# Altium PCB Brain_Stim_Final_Layout.PcbDoc (part 1 of 3)
Units mil, origin at the board's own origin, x right, y up, seen from the top; angles counter-clockwise.
Board outline 3530 x 5285 mil, 4 copper layers (Top Layer, Layer 1, Layer 2, Bottom Layer), stack 62.449 mil thick; 148 components, 116 nets, 618 pads, 378 vias.
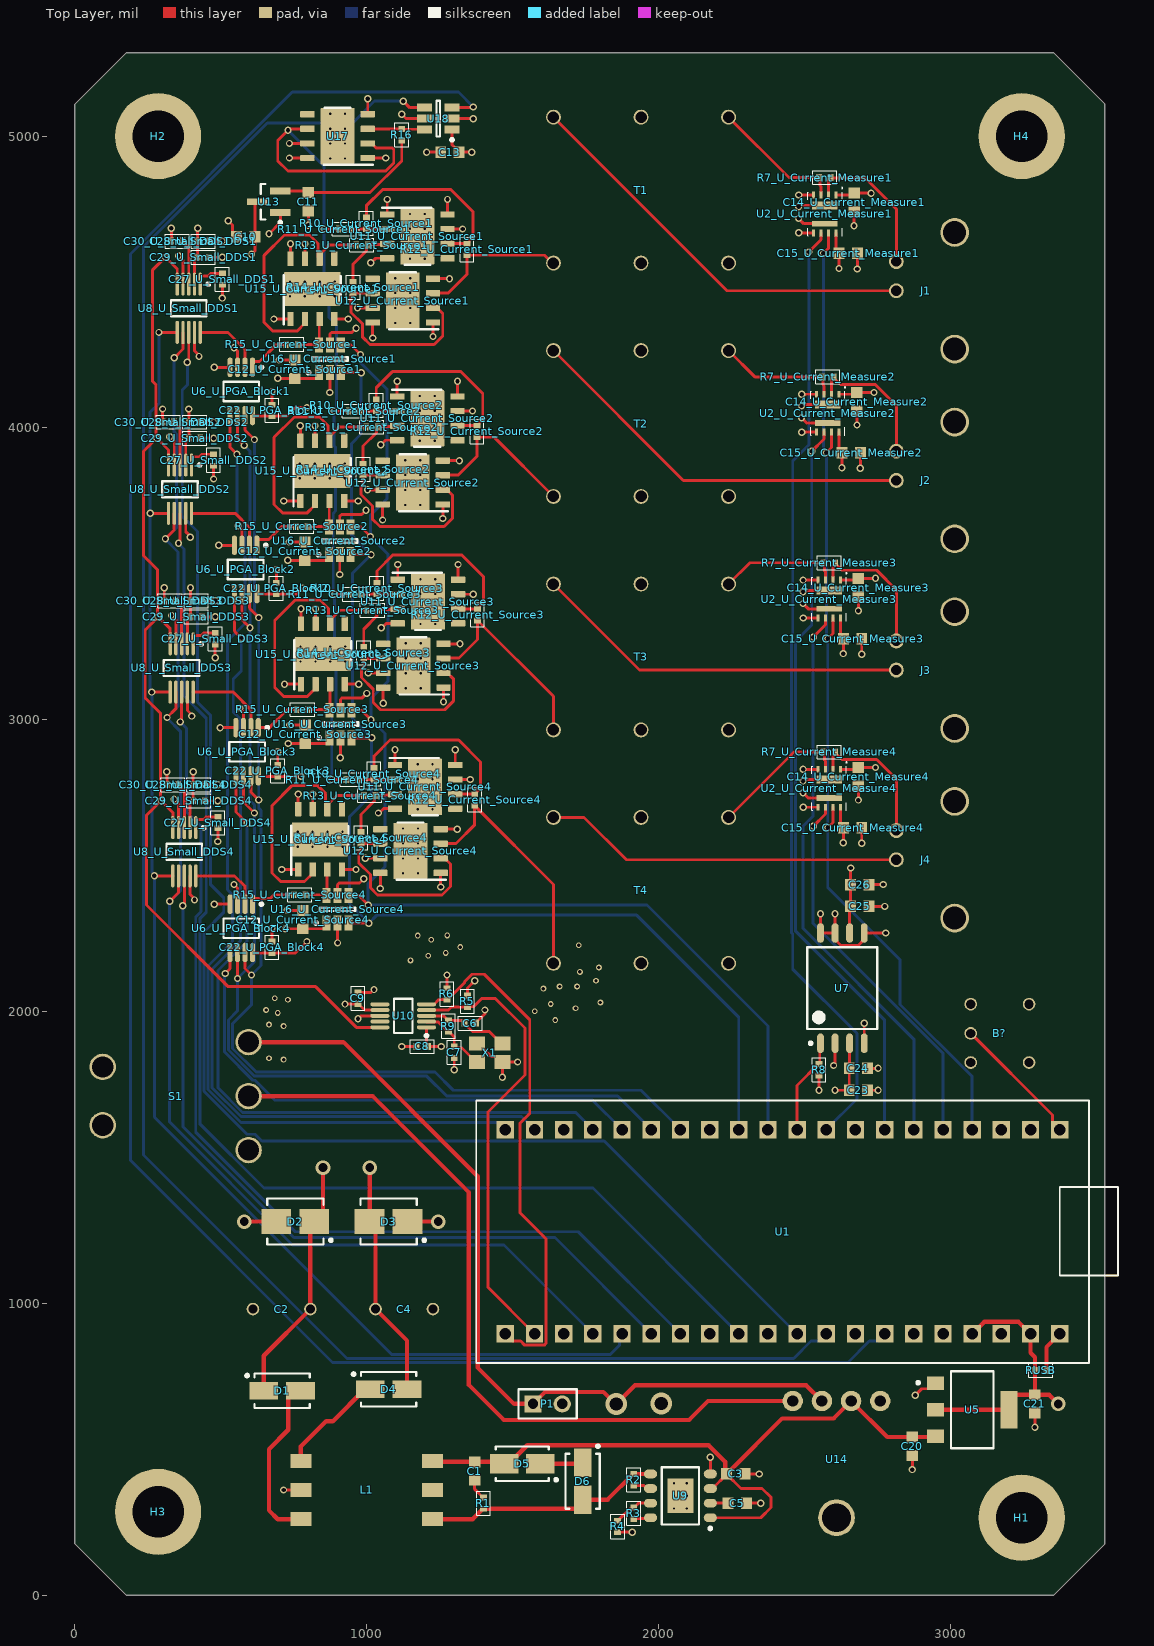
[diagram p0: Top Layer view]
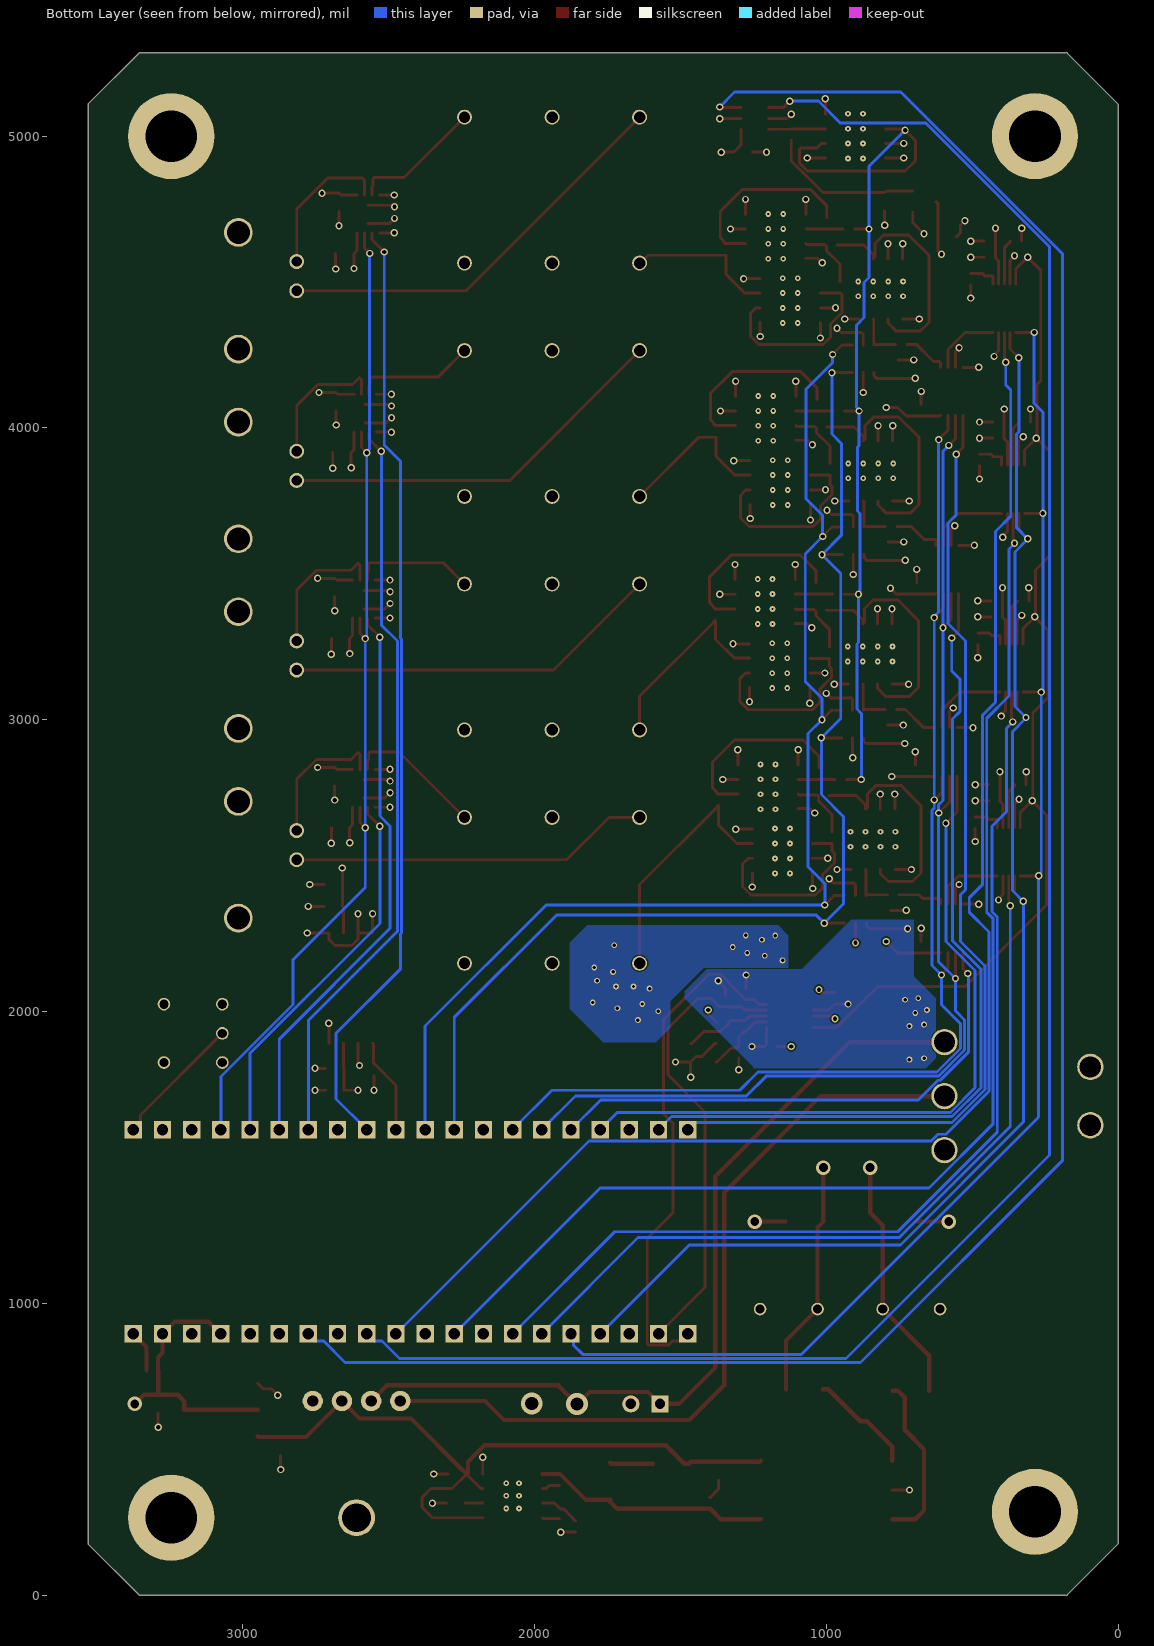
[diagram p1: Bottom Layer view, seen from below]
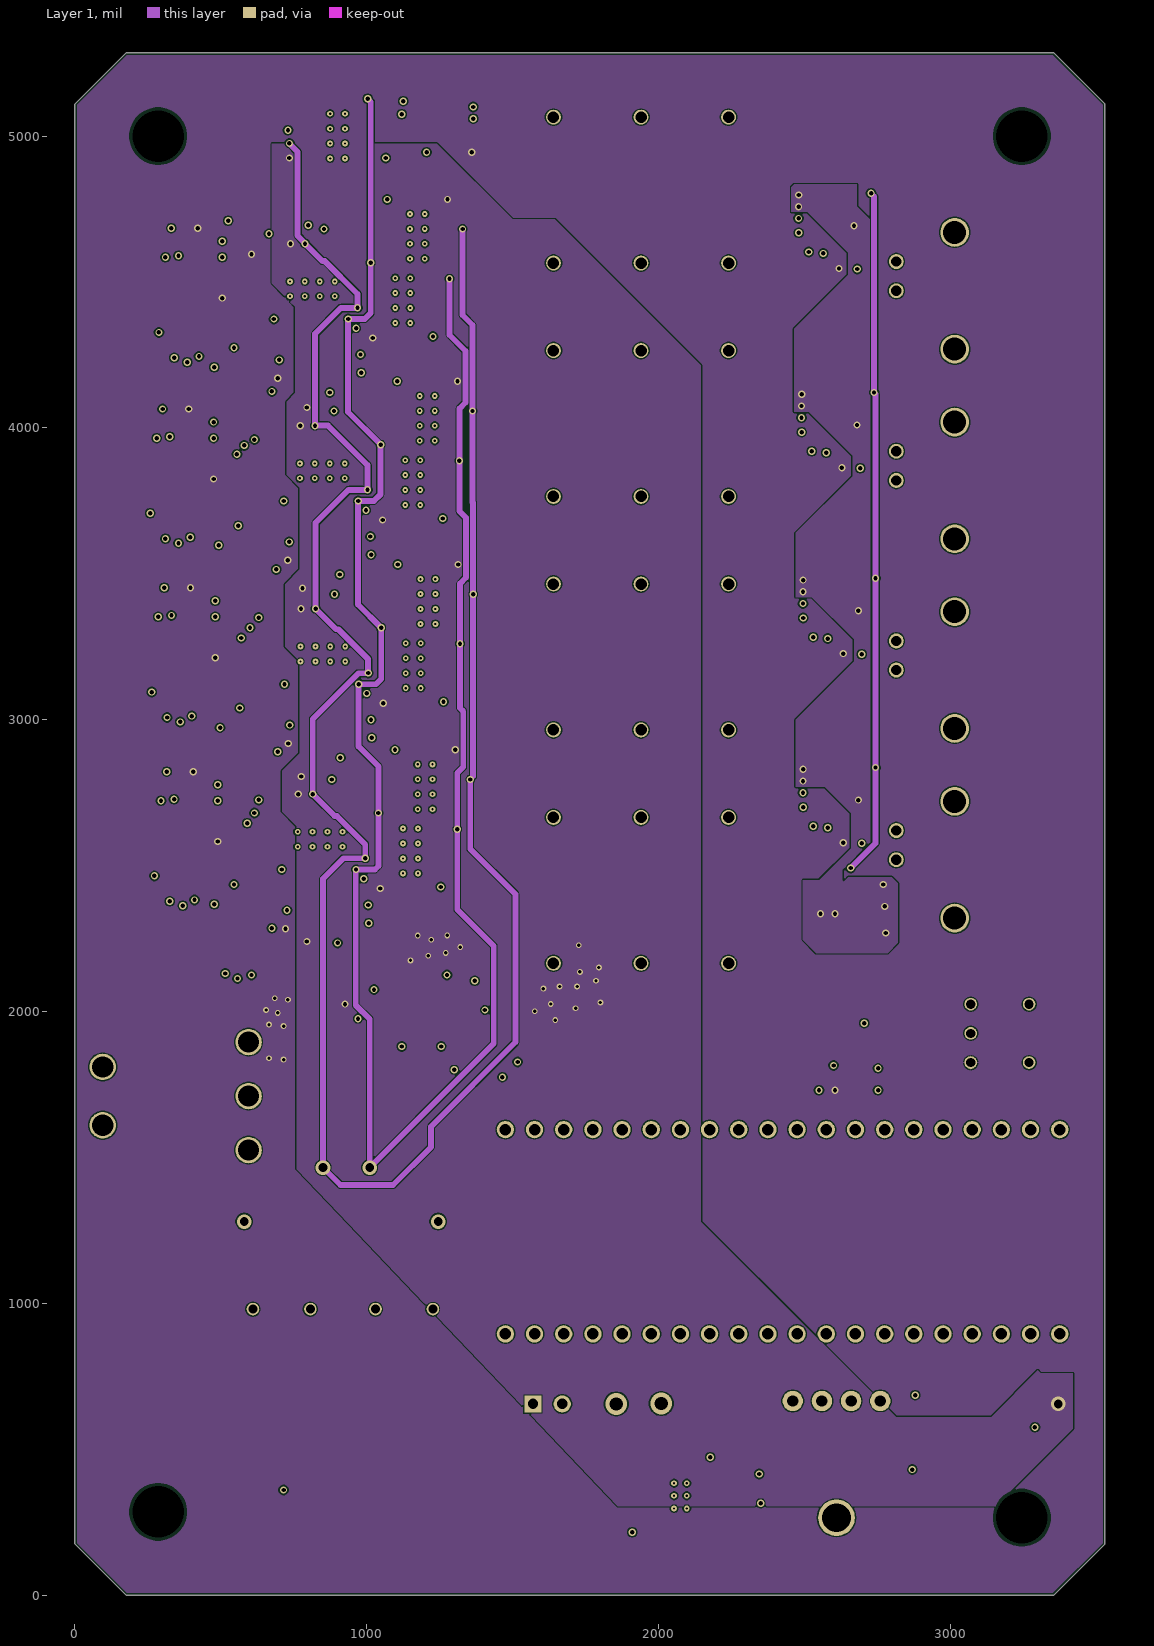
[diagram p2: Layer 1]
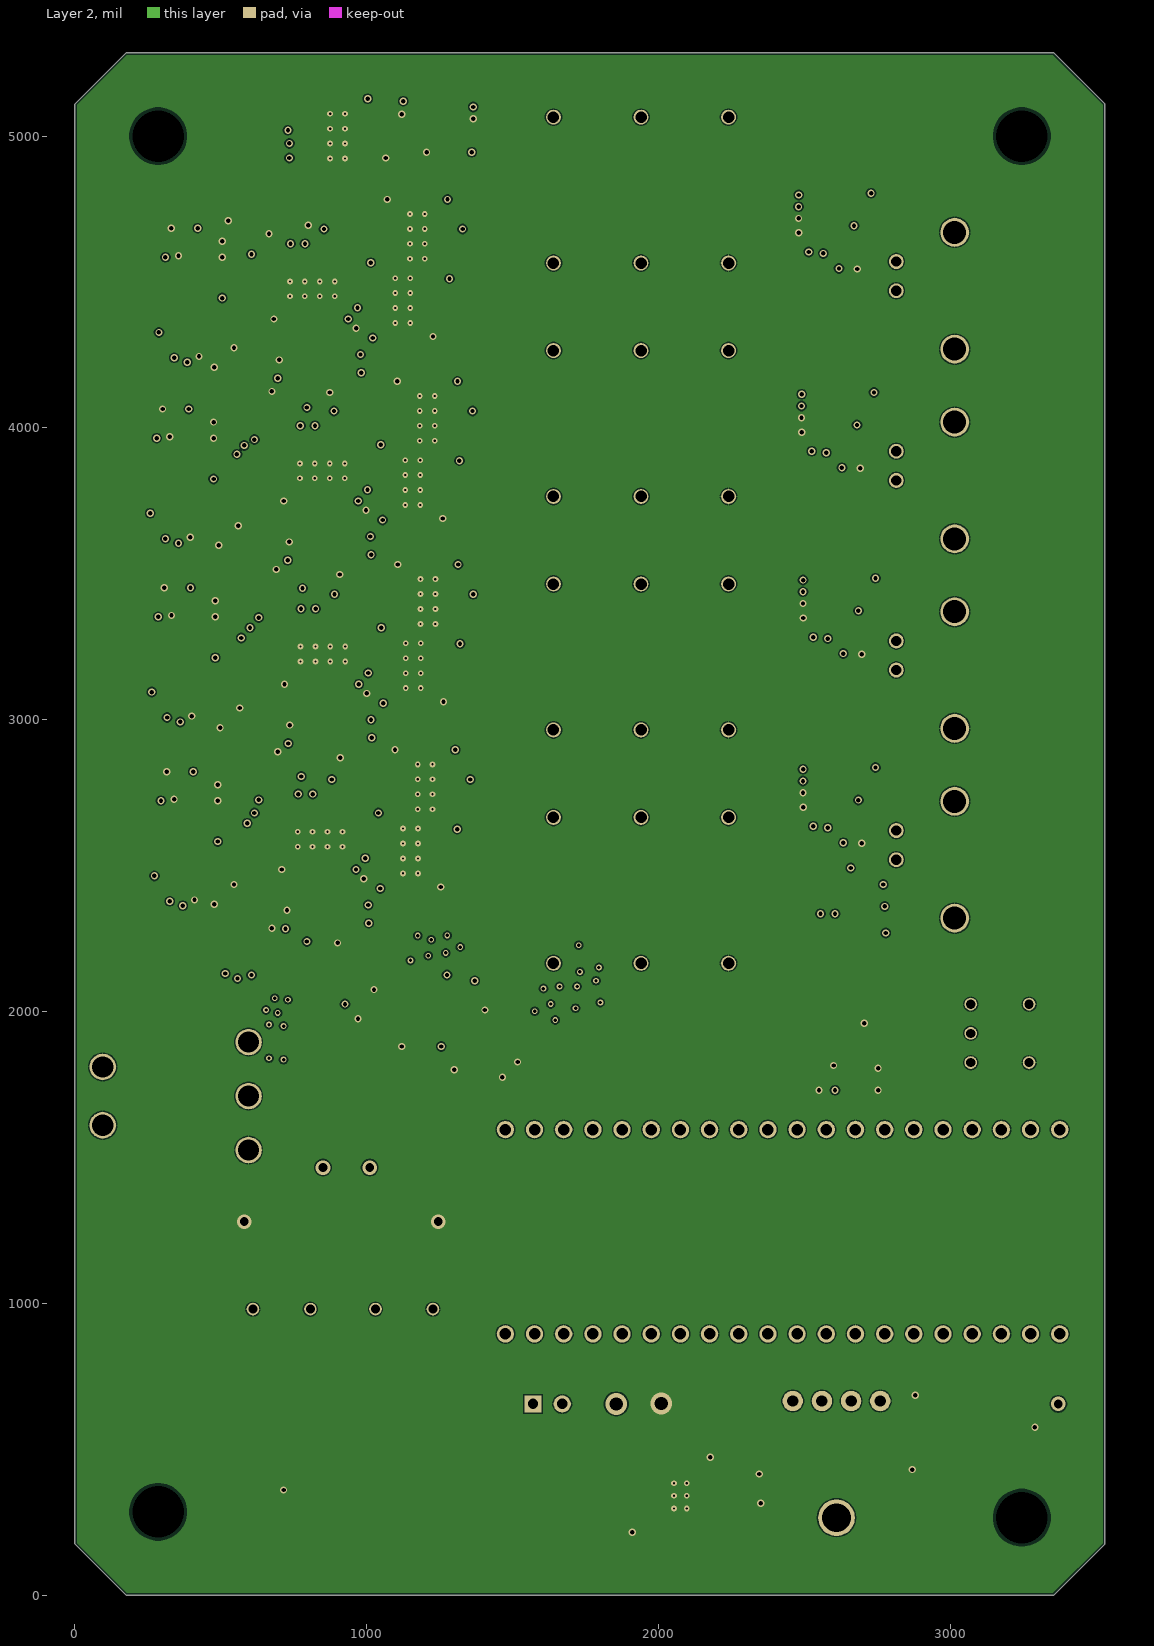
[diagram p3: Layer 2]

## Layer stack, top to bottom
Top Solder: solder mask 0.4, Solder Resist, Dk 3.5
Top Layer: signal copper 1.378
Dielectric 2: prepreg 8.2835, PP-006, Dk 4.1
Layer 1: signal copper 0.5984
Dielectric 1: prepreg 41.9291, FR-4, Dk 4.8
Layer 2: signal copper 0.5984
Dielectric 3: prepreg 8.2835, PP-006, Dk 4.1
Bottom Layer: signal copper 1.378
Bottom Solder: solder mask 0.4, Solder Resist, Dk 3.5

## Board outline
0,175 0,5110 175,5285 3355,5285 3530,5110 3530,175 3355,0 175,0

## Design rules (kind name [scope] priority, off if disabled: settings)
BoardOutlineClearance [All] p1: gap=7.87 ignorepadtopadclearanceinfootprint=FALSE
Clearance [All] p1: gap=4 ignorepadtopadclearanceinfootprint=FALSE except(5: Arc-Via Track-Via SMDPad-Via THPad-Via Via-Via Via-Fill Via-Poly Via-Region Via-Text; 9.84: Arc-Hole Track-Hole SMDPad-Hole THPad-Hole Via-Hole Fill-Hole Poly-Hole Region-Hole Text-Hole)
ComponentClearance [All] p1: gap=4 collisioncheckmode=3 verticalgap=4 showdistances=TRUE
DiffPairsRouting [All] p1: maxlimit=4 minlimit=4 mostfreqgap=4 toplayer_minwidth=4 toplayer_maxwidth=71497.94 toplayer_prefwidth=4 midlayer1_minwidth=4 midlayer1_maxwidth=71497.94 midlayer1_prefwidth=4 midlayer2_minwidth=4 midlayer2_maxwidth=71497.94 midlayer2_prefwidth=4 bottomlayer_minwidth=4 bottomlayer_maxwidth=71497.94 bottomlayer_prefwidth=4 maxuncoupledlength=500
Height [All] p1: minheight=0 maxheight=71497.94 prefheight=500
HoleSize [All] p1: absolutevalues=TRUE maxlimit=248.03 minlimit=7.87 maxpercent=80.000 minpercent=20.000
HoleToHoleClearance [All] p1: gap=9.84 allowstackedmicrovias=FALSE
MinimumAnnularRing [All] p1: minimumring=3
MinimumSolderMaskSliver [All] p1: minsoldermaskwidth=0
PlaneClearance [All] p1: clearance=4
PlaneConnect PlaneConnectPowerPads [InPadClass('PowerPads')] p1: planeconnectstyle=Direct reliefexpansion=20 reliefentries=4 reliefconductorwidth=10 reliefairgap=10
PlaneConnect [All] p2: pad.planeconnectstyle=Relief pad.reliefexpansion=11.81 pad.reliefentries=4 pad.reliefconductorwidth=4 pad.reliefairgap=4 via.planeconnectstyle=Direct via.reliefexpansion=11.81 via.reliefentries=4 via.reliefconductorwidth=5 via.reliefairgap=5
PolygonConnect PolygonConnectPowerPads [All vs (InPadClass('PowerPads'))] p1: connectstyle=Direct reliefconductorwidth=10 reliefentries=4 polygonreliefangle="90 Angle" airgapwidth=10
PolygonConnect [All] p2: thpad.connectstyle=Relief thpad.reliefconductorwidth=4 thpad.reliefentries=4 thpad.polygonreliefangle="90 Angle" thpad.airgapwidth=4 smdpad.connectstyle=Relief smdpad.reliefconductorwidth=4 smdpad.reliefentries=4 smdpad.polygonreliefangle="90 Angle" smdpad.airgapwidth=4 via.connectstyle=Direct via.reliefconductorwidth=5 via.reliefentries=4 via.polygonreliefangle="90 Angle" via.airgapwidth=5
RoutingVias [All] p1: holewidth=7.87 width=17.72 viastyle="Through Hole" minholewidth=7.87 minwidth=17.72 maxholewidth=248.03 maxwidth=257.87
SilkToSilkClearance [All] p1: silktosilkclearance=0
SilkToSolderMaskClearance [IsPad] p1: minsilkscreentomaskgap=4 clearancetoexposedcopper=TRUE
SolderMaskExpansion [All] p1: expansion=2.95 istentingtop=FALSE
Width [All] p1: maxlimit=71497.94 minlimit=4 preferedwidth=4
20 further rules are at their usual default settings.

## Classes and differential pairs
channel class Small_DDS: U_Small_DDS1 U_Small_DDS2 U_Small_DDS3 U_Small_DDS4
channel class PGA_Block: U_PGA_Block1 U_PGA_Block2 U_PGA_Block3 U_PGA_Block4
channel class Current_Source: U_Current_Source1 U_Current_Source2 U_Current_Source3 U_Current_Source4
channel class Current_Measure: U_Current_Measure1 U_Current_Measure2 U_Current_Measure3 U_Current_Measure4
net class Wave_In[4..1]: DDS_OUT1 DDS_OUT2 DDS_OUT3 DDS_OUT4
net class TF_LOW[4..1]: TF_LOW1 TF_LOW2 TF_LOW3 TF_LOW4
net class FROM_BRAIN[4..1]: FROM_BRAIN1 FROM_BRAIN2 FROM_BRAIN3 FROM_BRAIN4
net class DDS_OUT[4..1]: DDS_OUT1 DDS_OUT2 DDS_OUT3 DDS_OUT4
net class DDS_FSYNC[4..1]: DDS_FSYNC1 DDS_FSYNC2 DDS_FSYNC3 DDS_FSYNC4
net class CS_OUT[1..4]: CS_OUT1 CS_OUT2 CS_OUT3 CS_OUT4
net class CS_IN_SIG[1..4]: CH_AMP1 CH_AMP2 CH_AMP3 CH_AMP4
net class CH_AMP[4..1]: CH_AMP1 CH_AMP2 CH_AMP3 CH_AMP4
net class ADC_DATA[4..1]: ADC_DATA1 ADC_DATA2 ADC_DATA3 ADC_DATA4
net class \P\G\A\_\C\S\[4..1]: \P\G\A\_\C\S\1 \P\G\A\_\C\S\2 \P\G\A\_\C\S\3 \P\G\A\_\C\S\4
component class U_Stimulus_Feedback: C23 C24 C25 C26 R8 U7
component class U_Small_DDS4: C27_U_Small_DDS4 C28_U_Small_DDS4 C29_U_Small_DDS4 C30_U_Small_DDS4 U8_U_Small_DDS4
component class U_Small_DDS3: C27_U_Small_DDS3 C28_U_Small_DDS3 C29_U_Small_DDS3 C30_U_Small_DDS3 U8_U_Small_DDS3
component class U_Small_DDS2: C27_U_Small_DDS2 C28_U_Small_DDS2 C29_U_Small_DDS2 C30_U_Small_DDS2 U8_U_Small_DDS2
component class U_Small_DDS1: C27_U_Small_DDS1 C28_U_Small_DDS1 C29_U_Small_DDS1 C30_U_Small_DDS1 U8_U_Small_DDS1
component class U_PGA_Block4: C22_U_PGA_Block4 U6_U_PGA_Block4
component class U_PGA_Block3: C22_U_PGA_Block3 U6_U_PGA_Block3
component class U_PGA_Block2: C22_U_PGA_Block2 U6_U_PGA_Block2
component class U_PGA_Block1: C22_U_PGA_Block1 U6_U_PGA_Block1
component class U_Output_Isolation: J1 J2 J3 J4 T1 T2 T3 T4
component class U_Non_Isolated_Sources: C10 C11 C20 C21 U5 U13
component class U_MCU: B1 RUSB U1
component class U_High_Level_Connections: H1 H2 H3 H4
component class U_Four_DDS: C6 C7 C8 C9 R5 R6 R9 U10 X1
component class U_Flyback: C1 C2 C3 C4 C5 D1 D2 D3 D4 D5 D6 L1 R1 R2 R3 R4 U9
component class U_Current_Source4: C12_U_Current_Source4 R10_U_Current_Source4 R11_U_Current_Source4 R12_U_Current_Source4 R13_U_Current_Source4 R14_U_Current_Source4 R15_U_Current_Source4 U11_U_Current_Source4 U12_U_Current_Source4 U15_U_Current_Source4 U16_U_Current_Source4
component class U_Current_Source3: C12_U_Current_Source3 R10_U_Current_Source3 R11_U_Current_Source3 R12_U_Current_Source3 R13_U_Current_Source3 R14_U_Current_Source3 R15_U_Current_Source3 U11_U_Current_Source3 U12_U_Current_Source3 U15_U_Current_Source3 U16_U_Current_Source3
component class U_Current_Source2: C12_U_Current_Source2 R10_U_Current_Source2 R11_U_Current_Source2 R12_U_Current_Source2 R13_U_Current_Source2 R14_U_Current_Source2 R15_U_Current_Source2 U11_U_Current_Source2 U12_U_Current_Source2 U15_U_Current_Source2 U16_U_Current_Source2
component class U_Current_Source1: C12_U_Current_Source1 R10_U_Current_Source1 R11_U_Current_Source1 R12_U_Current_Source1 R13_U_Current_Source1 R14_U_Current_Source1 R15_U_Current_Source1 U11_U_Current_Source1 U12_U_Current_Source1 U15_U_Current_Source1 U16_U_Current_Source1
component class U_Current_Measure4: C14_U_Current_Measure4 C15_U_Current_Measure4 R7_U_Current_Measure4 U2_U_Current_Measure4
component class U_Current_Measure3: C14_U_Current_Measure3 C15_U_Current_Measure3 R7_U_Current_Measure3 U2_U_Current_Measure3
component class U_Current_Measure2: C14_U_Current_Measure2 C15_U_Current_Measure2 R7_U_Current_Measure2 U2_U_Current_Measure2
component class U_Current_Measure1: C14_U_Current_Measure1 C15_U_Current_Measure1 R7_U_Current_Measure1 U2_U_Current_Measure1
component class U_Curr_Source_Buffer: C13 R16 U17 U18
component class U_Battery_Connections: P1 S1 U14

## Components (designator, comment, footprint, x,y, rotation, side; value= is the part's Value field where it differs from the comment)
B? "Push toggle button" BB16AH-FA 3070,2025 r270 top locked
C1 "Cap" CAPC1608X05N 1370,425 r90 top value=0.47u
C2 "220uF Cap" A759KR227M1VAAE024 806.85,980 r90 top
C3 "Cap" CAPC1608X05N 2265,415 r180 top value=10u
C4 "220uF Cap" A759KR227M1VAAE024 1226.85,980 r90 top
C5 "Cap" CAPC1608X05N 2270,315 r180 top value=1u
C6 "Cap" 0402_Res 1355,1960 r180 top value="4p DNP"
C7 "Cap" 0402_Res 1300,1860 r90 top value="4p DNP"
C8 "Cap" 0402_Res 1190,1880 r0 top value=0.1u
C9 "Cap" 0402_Res 970,2045 r270 top value=0.1u
C10 "Cap" CAPC1608X05N 585,4655 r0 top value=1u
C11 "Cap" CAPC1608X05N 800,4775 r90 top value=1u
C12_U_Current_Source1 "Cap" CAPC1608X05N 753.5,4201.5 r270 top value=0.1u (schematic designator C12)
C12_U_Current_Source2 "Cap" CAPC1608X05N 787.6,3577.76 r270 top value=0.1u (schematic designator C12)
C12_U_Current_Source3 "Cap" CAPC1608X05N 789.69,2950 r270 top value=0.1u (schematic designator C12)
C12_U_Current_Source4 "Cap" CAPC1608X05N 780,2315 r270 top value=0.1u (schematic designator C12)
C13 "Cap" CAPC1608X05N 1285,4945 r0 top value=1u
C14_U_Current_Measure1 "Cap" CAPC1608X05N 2670,4772.99 r90 top value=0.1u (schematic designator C14)
C14_U_Current_Measure2 "Cap" CAPC1608X05N 2680,4090 r90 top value=0.1u (schematic designator C14)
C14_U_Current_Measure3 "Cap" CAPC1608X05N 2685,3452.99 r90 top value=0.1u (schematic designator C14)
C14_U_Current_Measure4 "Cap" CAPC1608X05N 2685,2804.53 r90 top value=0.1u (schematic designator C14)
C15_U_Current_Measure1 "Cap" CAPC1608X05N 2650,4597.99 r180 top value=0.1u (schematic designator C15)
C15_U_Current_Measure2 "Cap" CAPC1608X05N 2660,3915 r180 top value=0.1u (schematic designator C15)
C15_U_Current_Measure3 "Cap" CAPC1608X05N 2665,3277.99 r180 top value=0.1u (schematic designator C15)
C15_U_Current_Measure4 "Cap" CAPC1608X05N 2665,2629.53 r180 top value=0.1u (schematic designator C15)
C20 "Cap" CAPC1608X05N 2870,510 r90 top value=1u
C21 "Cap" CAPC1608X05N 3290,655 r90 top value=4.7u
C22_U_PGA_Block1 "Cap" 0402_Res 675,4060 r270 top value=0.1u (schematic designator C22)
C22_U_PGA_Block2 "Cap" 0402_Res 690,3450 r270 top value=0.1u (schematic designator C22)
C22_U_PGA_Block3 "Cap" 0402_Res 695,2825 r270 top value=0.1u (schematic designator C22)
C22_U_PGA_Block4 "Cap" 0402_Res 675,2220 r270 top value=0.1u (schematic designator C22)
C23 "Cap" CAPC1608X05N 2685,1730 r180 top value=10u
C24 "Cap" CAPC1608X05N 2685,1805 r180 top value=0.1u
C25 "Cap" CAPC1608X05N 2690,2360 r180 top value=0.22u
C26 "Cap" CAPC1608X05N 2690,2435 r180 top value=10u
C27_U_Small_DDS1 "Cap" 0402_Res 505,4510 r270 top value=10u (schematic designator C27)
C27_U_Small_DDS2 "Cap" 0402_Res 475,3890 r270 top value=10u (schematic designator C27)
C27_U_Small_DDS3 "Cap" 0402_Res 480.63,3277.32 r270 top value=10u (schematic designator C27)
C27_U_Small_DDS4 "Cap" 0402_Res 489.69,2647.32 r270 top value=10u (schematic designator C27)
C28_U_Small_DDS1 "Cap" 0402_Res 440,4640 r180 top value=0.1u (schematic designator C28)
C28_U_Small_DDS2 "Cap" 0402_Res 410,4020 r180 top value=0.1u (schematic designator C28)
C28_U_Small_DDS3 "Cap" 0402_Res 415.63,3407.32 r180 top value=0.1u (schematic designator C28)
C28_U_Small_DDS4 "Cap" 0402_Res 424.69,2777.32 r180 top value=0.1u (schematic designator C28)
C29_U_Small_DDS1 "Cap" 0402_Res 440,4585 r180 top value=10u (schematic designator C29)
C29_U_Small_DDS2 "Cap" 0402_Res 410,3965 r180 top value=10u (schematic designator C29)
C29_U_Small_DDS3 "Cap" 0402_Res 415.63,3352.32 r180 top value=10u (schematic designator C29)
C29_U_Small_DDS4 "Cap" 0402_Res 424.69,2722.32 r180 top value=10u (schematic designator C29)
C30_U_Small_DDS1 "Cap" 0402_Res 350,4640 r0 top value=0.1u (schematic designator C30)
C30_U_Small_DDS2 "Cap" 0402_Res 320,4020 r0 top value=0.1u (schematic designator C30)
C30_U_Small_DDS3 "Cap" 0402_Res 325.63,3407.32 r0 top value=0.1u (schematic designator C30)
C30_U_Small_DDS4 "Cap" 0402_Res 334.69,2777.32 r0 top value=0.1u (schematic designator C30)
D1 "Schottky 60V" "SK36A-LTP - duplicate" 710,700 r0 top
D2 "Zener 30V" SMBJ5363B-TP 755,1280 r180 top
D3 "Zener 30V" SMBJ5363B-TP 1075,1280 r180 top
D4 "Schottky 60V" "SK36A-LTP - duplicate" 1075,705 r0 top
D5 "Zener 24V" "CMZ5934B TR13 PBFREE" 1532.99,450 r180 top
D6 "Schottky 60V" "SK36A-LTP - duplicate" 1740,390 r270 top
H1 "M4 Mounting Hole" "Mounting Hole"#1 3220,265 r0 top
H2 "M4 Mounting Hole" "Mounting Hole"#2 310,4970 r0 top
H3 "M4 Mounting Hole" "Mounting Hole"#3 520,285 r0 top
H4 "M4 Mounting Hole" "Mounting Hole"#4 3245,5000 r0 top
J1 "BNC Connector" CONBNC002 2815,4670 r270 top locked
J2 "BNC Connector" CONBNC002 2815,4020 r270 top locked
J3 "BNC Connector" CONBNC002 2815,3370 r270 top locked
J4 "BNC Connector" CONBNC002 2815,2720 r270 top locked
L1 "Flyback Transformer" 750319949 1225,460 r180 top
P1 "Header 2" HDR1X2 1570,655 r0 top
R1 "Res1" 0402_Res 1400,315 r90 top value=39
R2 "Res1" 0402_Res 1915,395 r270 top value=158k
R3 "Res1" 0402_Res 1915,280 r90 top value=115k
R4 "Res1" 0402_Res 1860,235 r90 top value=10k
R5 "DNP" 0402_Res 1345,2035 r90 top value=4.7k
R6 "DNP" 0402_Res 1275,2060 r90 top value=4.7k
R7_U_Current_Measure1 "Res1" 0402_Res 2570,4857.99 r180 top value=10 (schematic designator R7)
R7_U_Current_Measure2 "Res1" 0402_Res 2580,4175 r180 top value=10 (schematic designator R7)
R7_U_Current_Measure3 "Res1" 0402_Res 2585,3537.99 r180 top value=10 (schematic designator R7)
R7_U_Current_Measure4 "Res1" 0402_Res 2585,2889.53 r180 top value=10 (schematic designator R7)
R8 "Res1" 0402_Res 2550,1800 r90 top value=4.7k
R9 "DNP" 0402_Res 1280,1950 r90 top value=1M
R10_U_Current_Source1 "DNP" 0402_Res 998.5,4701.5 r90 top value=40k (schematic designator R10)
R10_U_Current_Source2 "DNP" 0402_Res 1032.6,4077.76 r90 top value=40k (schematic designator R10)
R10_U_Current_Source3 "DNP" 0402_Res 1034.69,3450 r90 top value=40k (schematic designator R10)
R10_U_Current_Source4 "DNP" 0402_Res 1025,2815 r90 top value=40k (schematic designator R10)
R11_U_Current_Source1 "DNP" 0402_Res 923.5,4681.5 r180 top value=100k (schematic designator R11)
R11_U_Current_Source2 "DNP" 0402_Res 957.6,4057.76 r180 top value=100k (schematic designator R11)
R11_U_Current_Source3 "DNP" 0402_Res 959.69,3430 r180 top value=100k (schematic designator R11)
R11_U_Current_Source4 "DNP" 0402_Res 950,2795 r180 top value=100k (schematic designator R11)
R12_U_Current_Source1 "DNP" 0402_Res 1343.5,4611.5 r90 top value=100 (schematic designator R12)
R12_U_Current_Source2 "DNP" 0402_Res 1377.6,3987.76 r90 top value=100 (schematic designator R12)
R12_U_Current_Source3 "DNP" 0402_Res 1379.69,3360 r90 top value=100 (schematic designator R12)
R12_U_Current_Source4 "DNP" 0402_Res 1370,2725 r90 top value=100 (schematic designator R12)
R13_U_Current_Source1 "DNP" 0402_Res 983.5,4626.5 r180 top value=100k (schematic designator R13)
R13_U_Current_Source2 "DNP" 0402_Res 1017.6,4002.76 r180 top value=100k (schematic designator R13)
R13_U_Current_Source3 "DNP" 0402_Res 1019.69,3375 r180 top value=100k (schematic designator R13)
R13_U_Current_Source4 "DNP" 0402_Res 1010,2740 r180 top value=100k (schematic designator R13)
R14_U_Current_Source1 "DNP" 0402_Res 953.5,4481.5 r90 top value=40k (schematic designator R14)
R14_U_Current_Source2 "DNP" 0402_Res 987.6,3857.76 r90 top value=40k (schematic designator R14)
R14_U_Current_Source3 "DNP" 0402_Res 989.69,3230 r90 top value=40k (schematic designator R14)
R14_U_Current_Source4 "DNP" 0402_Res 980,2595 r90 top value=40k (schematic designator R14)
R15_U_Current_Source1 "DNP" 0402_Res 743.5,4286.5 r0 top value=50k (schematic designator R15)
R15_U_Current_Source2 "DNP" 0402_Res 777.6,3662.76 r0 top value=50k (schematic designator R15)
R15_U_Current_Source3 "DNP" 0402_Res 779.69,3035 r0 top value=50k (schematic designator R15)
R15_U_Current_Source4 "DNP" 0402_Res 770,2400 r0 top value=50k (schematic designator R15)
R16 "DNP" 0402_Res 1120,5005 r90 top value=50k
RUSB "DNP" 0402_Res 3310,770 r0 top value=0
S1 "100SP1T2B4M6QE" 100SP1T2B4M6QE 595,1710 r180 top
T1 "108E" 108E 1640,4565 r0 top locked
T2 "108E" 108E 1640,3765 r0 top locked
T3 "108E" 108E 1640,2965 r0 top locked
T4 "108E" 108E 1640,2165 r0 top locked
U1 "RASPBERRY_PI_PICO" RASPBERRY_PI_PICO 2475,1245 r270 top locked
U2_U_Current_Measure1 "ADC" SON65P350X100_HS-9N 2570,4733.46 r270 top (schematic designator U2)
U2_U_Current_Measure2 "ADC" SON65P350X100_HS-9N 2580,4050.47 r270 top (schematic designator U2)
U2_U_Current_Measure3 "ADC" SON65P350X100_HS-9N 2585,3413.46 r270 top (schematic designator U2)
U2_U_Current_Measure4 "ADC" SON65P350X100_HS-9N 2585,2765 r270 top (schematic designator U2)
U5 "LDL1117S50R" FP-SOT-223-0046067_14-MFG 3075,635 r0 top
U6_U_PGA_Block1 "MCP6S21T-I/MS" MSOP-MS8_N 570,4125 r270 top (schematic designator U6)
U6_U_PGA_Block2 "MCP6S21T-I/MS" MSOP-MS8_N 585,3515 r270 top (schematic designator U6)
U6_U_PGA_Block3 "MCP6S21T-I/MS" MSOP-MS8_N 590,2890 r270 top (schematic designator U6)
U6_U_PGA_Block4 "MCP6S21T-I/MS" MSOP-MS8_N 570,2285 r270 top (schematic designator U6)
U7 "ADUM6028-3WBRIZ-RL" ADUM6028-3WBRIZ-RL 2630,2080 r90 top
U8_U_Small_DDS1 "AD9833BRMZ" ADI-RM-10_M 390,4410 r270 top (schematic designator U8)
U8_U_Small_DDS2 "AD9833BRMZ" ADI-RM-10_M 360,3790 r270 top (schematic designator U8)
U8_U_Small_DDS3 "AD9833BRMZ" ADI-RM-10_M 365.63,3177.32 r270 top (schematic designator U8)
U8_U_Small_DDS4 "AD9833BRMZ" ADI-RM-10_M 374.69,2547.32 r270 top (schematic designator U8)
U9 "LT8302ES8E#TRPBF" LT-S8E-8_V 2075,340 r180 top
U10 "Si5351A-B-GT" SLAB-MSOP-10_N 1125,1985 r180 top
U11_U_Current_Source1 "OPA454AIDDA" DDA0008C_L 1173.5,4656.5 r0 top (schematic designator U11)
U11_U_Current_Source2 "OPA454AIDDA" DDA0008C_L 1207.6,4032.76 r0 top (schematic designator U11)
U11_U_Current_Source3 "OPA454AIDDA" DDA0008C_L 1209.69,3405 r0 top (schematic designator U11)
U11_U_Current_Source4 "OPA454AIDDA" DDA0008C_L 1200,2770 r0 top (schematic designator U11)
U12_U_Current_Source1 "OPA454AIDDA" DDA0008C_L 1123.5,4436.5 r180 top (schematic designator U12)
U12_U_Current_Source2 "OPA454AIDDA" DDA0008C_L 1157.6,3812.76 r180 top (schematic designator U12)
U12_U_Current_Source3 "OPA454AIDDA" DDA0008C_L 1159.69,3185 r180 top (schematic designator U12)
U12_U_Current_Source4 "OPA454AIDDA" DDA0008C_L 1150,2550 r180 top (schematic designator U12)
U13 "MCP1700T-2502E/TT" SOT-23-TT3_M 664.37,4775 r180 top
U14 "Adafruit 12V Bias Voltage Boost Converter - TPS61040" 12V_Suppy 2760,665 r180 top
U15_U_Current_Source1 "OPA454AIDDA" DDA0008C_L 813.5,4476.5 r90 top (schematic designator U15)
U15_U_Current_Source2 "OPA454AIDDA" DDA0008C_L 847.6,3852.76 r90 top (schematic designator U15)
U15_U_Current_Source3 "OPA454AIDDA" DDA0008C_L 849.69,3225 r90 top (schematic designator U15)
U15_U_Current_Source4 "OPA454AIDDA" DDA0008C_L 840,2590 r90 top (schematic designator U15)
U16_U_Current_Source1 "MCP4012T-503E/CH" SOT-23-CH6_M 873.5,4236.5 r90 top (schematic designator U16)
U16_U_Current_Source2 "MCP4012T-503E/CH" SOT-23-CH6_M 907.6,3612.76 r90 top (schematic designator U16)
U16_U_Current_Source3 "MCP4012T-503E/CH" SOT-23-CH6_M 909.69,2985 r90 top (schematic designator U16)
U16_U_Current_Source4 "MCP4012T-503E/CH" SOT-23-CH6_M 900,2350 r90 top (schematic designator U16)
U17 "OPA454AIDDA" DDA0008C_L 900,5000 r180 top
U18 "MCP4012T-503E/CH" SOT-23-CH6_M 1245,5060 r180 top
X1 "XTAL" XTAL_Basic 1378.39,1827.01 r0 top

## Footprints (in the part's own frame and the unit in brackets; to place one, negate y for a bottom-side part, rotate by r counter-clockwise, add the part's x,y. Pads: shape width x height; smd on the part's side, far side on the other; paste and mask are expansions set on the pad)
12V_Suppy [mil]
  round 70 hole 39.37: 1(300,0) 2(200,0) 3(100,0) 4(0,0)
  round 125.98 hole 98.43: M1(150,400)
  body extent -50,-100 354,500, height 150
100SP1T2B4M6QE [mm]
  round 2.3 hole 1.85: 1(0,4.7) 2(0,0) 3(0,-4.7) 4(12.7,-2.54) 5(12.7,2.54)
  body extent 3.81,-6.35 26.66,6.35, height 6.86
108E [mm]
  round 1.3 hole 1: 1(0,0) 2(7.62,0) 3(15.24,0) 4(15.24,12.7) 5(7.62,12.7) 6(0,12.7)
  body extent -5.46,-3.3 20.57,16.13, height 20.2
0402_Res [mm]
  rect 0.5x0.6 smd: 1(-0.5,0) 2(0.5,0)
  silkscreen extent -1.05,-0.6 1.05,0.6
750319949 [mm]
  rect 1.82x1.22 smd: 1(0,5.08) 2(0,2.54) 3(0,0) 4(11.45,0) 5(11.45,2.54) 6(11.45,5.08)
  body extent 1,-1.8 10.45,6.7, height 5.5
A759KR227M1VAAE024 [mm]
  round 1.1 hole 0.8: 1(0,0) 2(0,5)
  body extent -5,-2.5 5,7.5, height 17.4
ADI-RM-10_M [mm] "TSSOP, 10-Leads, Body 3x3mm, Pitch 0.5mm, IPC Low Density"
  oval 2x0.3 smd: 1(-2.1,1) 2(-2.1,0.5) 3(-2.1,0) 4(-2.1,-0.5) 5(-2.1,-1) 6(2.1,-1) 7(2.1,-0.5) 8(2.1,0) 9(2.1,0.5) 10(2.1,1)
  silkscreen extent -2.22,-1.55 0.7,1.83, body extent -1.55,-1.55 1.55,1.55, height 1.1
ADUM6028-3WBRIZ-RL [mm]
  oval 1.7x0.6 smd: 1(-4.8,1.905) 2(-4.8,0.635) 3(-4.8,-0.635) 4(-4.8,-1.905) 5(4.8,-1.905) 6(4.8,-0.635) 7(4.8,0.635) 8(4.8,1.905)
  silkscreen extent -4.92,-3.05 3.55,3.05, body extent -5.16,-3.05 5.16,3.05, height 2.65
BB16AH-FA [mm]
  round 1.1 hole 0.8: 1(5.08,0) 2(2.54,0) 3(0,0) M1(5.08,5.08) M2(0,5.08)
  body extent -1.86,0 6.94,19.3, height 6.8
CAPC1608X05N [mm] "Chip Capacitor, 2-Leads, Body 1.55x0.85mm, IPC Medium Density"
  rect 0.95x1 smd: 1(-0.8,0) 2(0.8,0)
  body extent -0.8,-0.45 0.8,0.45, height 0.5
"CMZ5934B TR13 PBFREE" [mm]
  rect 2.5x1.7 smd: 1(-1.575,0) 2(1.575,0)
  silkscreen extent -3.08,-1.5 2.3,1.52, body extent -2.52,-1.46 2.52,1.46, height 2.62
CONBNC002 [mm]
  round 1.3 hole 0.89: 1(5.08,0) 2(2.54,0)
  round 2.5 hole 2: 3(0,5.08) 4(10.16,5.08)
  body extent -2.37,0 12.53,35.15, height 13.1
DDA0008C_L [mm] "SOP, 8-Leads, Body 4x5mm, Pitch 1.27mm, Thermal Pad 2.4x3mm, IPC High Density"
  rrect18% 1.25x0.55 smd: 1(-2.625,1.905) 2(-2.625,0.635) 3(-2.625,-0.635) 4(-2.625,-1.905) 5(2.625,-1.905) 6(2.625,-0.635) 7(2.625,0.635) 8(2.625,1.905)
  rrect4% 2.95x4.9 smd paste-1.5 mask-1.5: 9(0,0)
  rrect4% 2.49x3 on Top Paste: 9(0,0)
  rrect4% 2.49x3 on Top Solder: 9(0,0)
  silkscreen extent -3.08,-2.47 1.2,2.5, body extent -3.01,-2.45 3.01,2.45, height 1.7
FP-SOT-223-0046067_14-MFG [mm]
  rect 1.5x1.2 smd paste+0 mask+0: 1(-3.2,2.3) 2(-3.2,0) 3(-3.2,-2.3)
  rect 1.5x3.3 smd paste+0 mask+0: 4(3.2,0)
  silkscreen extent -4.82,-3.35 1.85,3.35, body extent -4.05,-3.45 4.05,3.45, height 0.25
HDR1X2 [mm] "Connector; Header; 2 Position"
  rect 1.5x1.5 hole 0.9: 1(0,0)
  round 1.5 hole 0.9: 2(2.54,0)
  silkscreen extent -1.27,-1.27 3.81,1.27
LT-S8E-8_V [mm] "SOIC, 8-Leads, Body 4.9x3.9mm, Pitch 1.27mm, Thermal Pad 3.25x2.26mm, Recommended"
  oval 1.143x0.76 smd: 1(-2.602,1.905) 2(-2.602,0.635) 3(-2.602,-0.635) 4(-2.602,-1.905) 5(2.601,-1.905) 6(2.601,-0.635) 7(2.601,0.635) 8(2.601,1.905)
  rect 2.26x2.99 smd: 9(0,0)
  silkscreen extent -2.73,-2.5 1.62,2.96, body extent -3.01,-2.45 3.01,2.45, height 1.75
"Mounting Hole"#1 [mm]
  round 7.5 / inner round 2.5 / far side round 7.5 hole 4.5: M4(0.635,0)
"Mounting Hole"#2 [mm]
  round 7.5 / inner round 2.5 / far side round 7.5 hole 4.5: M4(-0.635,0.762)
"Mounting Hole"#3 [mm]
  round 7.5 / inner round 2.5 / far side round 7.5 hole 4.5: M4(-5.969,0)
"Mounting Hole"#4 [mm]
  round 7.5 / inner round 2.5 / far side round 7.5 hole 4.5: M4(0,0)
MSOP-MS8_N [mm] "TSOP, 8-Leads, Body 3x3mm, Pitch 0.65mm, IPC Medium Density"
  oval 1.7x0.45 smd: 1(-2.1,0.975) 2(-2.1,0.325) 3(-2.1,-0.325) 4(-2.1,-0.975) 5(2.1,-0.975) 6(2.1,-0.325) 7(2.1,0.325) 8(2.1,0.975)
  silkscreen extent -2.22,-1.55 0.85,1.88, body extent -1.55,-1.55 1.55,1.55, height 1.1
RASPBERRY_PI_PICO [mm]
  rect 1.508x1.508 / inner round 1.508 / far side rect 1.508x1.508 hole 1: 3V3(8.89,12.7) 3V3_EN(8.89,15.24) ADC_VREF(8.89,10.16) AGND(8.89,5.08) GND(8.89,17.78) GND2(8.89,-7.62) GND3(8.89,-20.32) GND4(-8.89,17.78) GND5(-8.89,5.08) GND6(-8.89,-7.62) GND7(-8.89,-20.32) GP0(-8.89,22.86) GP1(-8.89,20.32) GP2(-8.89,15.24) GP3(-8.89,12.7) GP4(-8.89,10.16) GP5(-8.89,7.62) GP6(-8.89,2.54) GP7(-8.89,0) GP8(-8.89,-2.54) GP9(-8.89,-5.08) GP10(-8.89,-10.16) GP11(-8.89,-12.7) GP12(-8.89,-15.24) GP13(-8.89,-17.78) GP14(-8.89,-22.86) GP15(-8.89,-25.4) GP16(8.89,-25.4) GP17(8.89,-22.86) GP18(8.89,-17.78) GP19(8.89,-15.24) GP20(8.89,-12.7) GP21(8.89,-10.16) GP22(8.89,-5.08) GP26_A0(8.89,0) GP27_A1(8.89,2.54) GP28_A2(8.89,7.62) RUN(8.89,-2.54) VBUS(8.89,22.86) VSYS(8.89,20.32)
  silkscreen extent -11.43,-27.94 11.43,27.94, body extent -10.5,-25.5 10.5,26.8, height 3.73
"SK36A-LTP - duplicate" [mm] "Molded Diode, 2-Leads, Body 4.38x2.59mm, IPC Medium Density"
  rect 2.5x1.55 smd: 1(-1.6,0) 2(1.6,0)
  silkscreen extent -3.17,-1.5 2.4,1.5, body extent -2.6,-1.46 2.6,1.46, height 2.44
SLAB-MSOP-10_N [mm] "SOP, 10-Leads, Body 3x3mm, Pitch 0.5mm, IPC Medium Density"
  oval 1.65x0.35 smd: 1(-2.025,1) 2(-2.025,0.5) 3(-2.025,0) 4(-2.025,-0.5) 5(-2.025,-1) 6(2.025,-1) 7(2.025,-0.5) 8(2.025,0) 9(2.025,0.5) 10(2.025,1)
  silkscreen extent -2.15,-1.5 0.8,1.85, body extent -1.5,-1.5 1.5,1.5, height 1.1
SMBJ5363B-TP [mm] "Molded Diode, 2-Leads, Body 4.46x3.62mm, IPC Medium Density"
  rect 2.6x2.15 smd: 1(-1.65,0) 2(1.65,0)
  silkscreen extent -3.22,-2 2.45,2, body extent -2.65,-1.97 2.65,1.97, height 2.62
SON65P350X100_HS-9N [mm] "SON, 8-Leads, Body 2.70x3.50mm, Pitch 0.65mm, Thermal Pad 2.23x0.70mm, IPC Medium Density"
  rect 0.6x0.25 smd: 1(-1.65,0.975) 2(-1.65,0.325) 3(-1.65,-0.325) 4(-1.65,-0.975) 5(1.65,-0.975) 6(1.65,-0.325) 7(1.65,0.325) 8(1.65,0.975)
  rect 0.7x2.23 smd: 9(-0.75,0)
  rect 0.5x2.23 smd: 10(0.85,0)
  silkscreen extent -2.3,-1.5 1.9,1.55, body extent -1.8,-1.4 1.8,1.4, height 1
SOT-23-CH6_M [mm] "SOT23, 6-Leads, Body 2.9x1.7mm, Pitch 0.95mm, Lead Span 2.8mm, IPC Low Density"
  rect 1.3x0.7 smd: 1(-1.2,0.95) 2(-1.2,0) 3(-1.2,-0.95) 4(1.2,-0.95) 5(1.2,0) 6(1.2,0.95)
  silkscreen extent -1.32,-1.55 0.15,1.97, body extent -0.9,-1.55 0.9,1.55, height 1.45
SOT-23-TT3_M [mm] "SOT23, 3-Leads, Body 2.9x1.3mm, Pitch 0.95mm, Lead Span 2.4mm, IPC Low Density"
  rect 1.8x0.6 smd: 1(-1,0.95) 2(-1,-0.95) 3(1,0)
  silkscreen extent -1.13,-1.55 0.7,1.92, body extent -0.7,-1.52 0.7,1.53, height 1.12
XTAL_Basic [mm]
  rect 1.4x1.2 smd: 1(0,0) 2(2.2,0) 3(2.2,1.6) 4(0,1.6)

## Part data
B?: library part BB16AH-FA, Supplier Part Number 1=360-3705-ND, Supplier 1=DigiKey
C1 C3 C5 C6 C7 C8 C9 C10 C11 C12_U_Current_Source1 C12_U_Current_Source2 C12_U_Current_Source3 C12_U_Current_Source4 C13 C14_U_Current_Measure1 C14_U_Current_Measure2 C14_U_Current_Measure3 C14_U_Current_Measure4 C15_U_Current_Measure1 C15_U_Current_Measure2 C15_U_Current_Measure3 C15_U_Current_Measure4 C20 C21 C22_U_PGA_Block1 C22_U_PGA_Block2 C22_U_PGA_Block3 C22_U_PGA_Block4 C23 C24 C25 C26 C27_U_Small_DDS1 C27_U_Small_DDS2 C27_U_Small_DDS3 C27_U_Small_DDS4 C28_U_Small_DDS1 C28_U_Small_DDS2 C28_U_Small_DDS3 C28_U_Small_DDS4 C29_U_Small_DDS1 C29_U_Small_DDS2 C29_U_Small_DDS3 C29_U_Small_DDS4 C30_U_Small_DDS1 C30_U_Small_DDS2 C30_U_Small_DDS3 C30_U_Small_DDS4: "Capacitor", LatestRevisionDate=17-Jul-2002, LatestRevisionNote="Re-released for DXP Platform.", PackageDescription="Radial Cap, Thru-Hole; 2 Leads; 0.3 in Pin Spacing", PackageReference=RAD-0.3, Published=8-Jun-2000, Publisher="Altium Limited"
C2: library part A759KR227M1VAAE024, Supplier Part Number 1=1189-50PZJ220M10X15-ND, Supplier 1=DigiKey
C4: library part A759KR227M1VAAE024, Supplier Part Number 1=61AK1211, Supplier 1=Newark
D1 D4 D6: library part SK36A-LTP, Supplier 1="Arrow Electronics"
D2 D3: library part SMBJ5363B-TP, Supplier 1="Arrow Electronics"
D5: library part "CMZ5934B TR13 PBFREE", Supplier Part Number 1=1514-CMZ5934BTR13PBFREECT-ND, Supplier 1=DigiKey
H1 H2 H3 H4: library part "MOUNTING HOLE M4"
J1 J2 J3 J4: library part CONBNC002, Supplier 1=Newark, Supplier Part Number 1=CONBNC002
L1: library part 750319949, Supplier Part Number 1=1297-750319949CT-ND, Supplier 1=DigiKey
P1: "Header, 2-Pin", LatestRevisionDate=17-Jul-2002, LatestRevisionNote="Re-released for DXP Platform.", Publisher="Altium Limited"
R1 R2 R3 R4 R7_U_Current_Measure1 R7_U_Current_Measure2 R7_U_Current_Measure3 R7_U_Current_Measure4 R8: "Resistor", LatestRevisionDate=17-Jul-2002, LatestRevisionNote="Re-released for DXP Platform.", PackageDescription="Axial Device, Thru-Hole; 2 Leads; 0.3 in Pin Spacing", PackageReference=AXIAL-0.3, Published=8-Jun-2000, Publisher="Altium Limited"
R5 R6 R9 R10_U_Current_Source1 R10_U_Current_Source2 R10_U_Current_Source3 R10_U_Current_Source4 R11_U_Current_Source1 R11_U_Current_Source2 R11_U_Current_Source3 R11_U_Current_Source4 R12_U_Current_Source1 R12_U_Current_Source2 R12_U_Current_Source3 R12_U_Current_Source4 R13_U_Current_Source1 R13_U_Current_Source2 R13_U_Current_Source3 R13_U_Current_Source4 R14_U_Current_Source1 R14_U_Current_Source2 R14_U_Current_Source3 R14_U_Current_Source4 R15_U_Current_Source1 R15_U_Current_Source2 R15_U_Current_Source3 R15_U_Current_Source4 R16 RUSB: library part Res1, "Resistor", LatestRevisionDate=17-Jul-2002, LatestRevisionNote="Re-released for DXP Platform.", PackageDescription="Axial Device, Thru-Hole; 2 Leads; 0.3 in Pin Spacing", PackageReference=AXIAL-0.3, Published=8-Jun-2000, Publisher="Altium Limited"
S1: Supplier Part Number 1=EG2362-ND, Supplier 1=DigiKey
T1 T2 T3 T4: Supplier Part Number 1=HM2380-ND, Supplier 1=DigiKey
U1: "Raspberry Pi Board, Arm Cortex-M0+; Core Architecture:Arm; Core Sub-Architecture:Cortex-M0+; Kit Contents:Raspberry Pi Pico Board; No. Of Bits:32Bit; Silicon Core Number:Rp2040; Silicon Manufacturer:Raspberry Pi", Package=None, Check_prices=https://www.snapeda.com/parts/RASPBERRY%20PI%20PICO/Raspberry+Pi/view-part/?ref=eda, MF="Raspberry Pi", MP="RASPBERRY PI PICO", SnapEDA_Link=https://www.snapeda.com/parts/RASPBERRY%20PI%20PICO/Raspberry+Pi/view-part/?ref=snap
U2_U_Current_Measure1 U2_U_Current_Measure2 U2_U_Current_Measure3 U2_U_Current_Measure4: Supplier Part Number 1=296-AMC0106M05DENRCT-ND, Supplier 1=DigiKey
U5: library part CMP-12153-000005-1, "IC REG LINEAR 5V 1.2A SOT223", Dropout Voltage=350mV, Manufacturer=STMicroelectronics, Max Junction Temp=+150°C, Max Supply Voltage=18V, Min Supply Voltage=2.6V, Nominal Supply Current=250uA, Output Current=2A, Output Voltage=5V, Package=SOT-223-0046067_14, Temperature="-40°C to +125°C", Temperature Range High=+125°C, Temperature Range Low=-40°C, Accuracy Percentage=2%, Automotive=No, Category=IC, ComponentLink2Description=Datasheet, ComponentLink2URL=https://www.st.com/content/ccc/resource/technical/document/datasheet/group3/0e/5a/00/ca/10/1a/4f/a5/DM00366442/files/DM00366442.pdf/jcr:content/translations/en.DM00366442.pdf, Device Class L1="Integrated Circuits (ICs)", Device Class L2="Power Management ICs", Device Class L3="Voltage Regulators - Linear", Digikey Description="IC REG LINEAR 5V 1.2A SOT223", Height=1.9mm, Lead Free=Yes, Manufacturer Part Number=LDL1117S50R, Mouser Description="LDL1117 Series 1.2 A 5 V High PSRR LDO Linear Voltage Regulator - SOT-223", Number Of Outputs=1, Octopart=https://octopart.com/ldl1117s50r-stmicroelectronics-81876164, Output Type=Fixed, RoHS=TRUE, Standoff Height=0.02mm
U6_U_PGA_Block1 U6_U_PGA_Block2 U6_U_PGA_Block3 U6_U_PGA_Block4: library part CMP-0187-00515-2, "Single-Ended, Rail-to-Rail Input/Output, Low-Gain Programmable Gain Amplifier, 8-Pin MSOP, Industrial Temperature, Tape and Reel", ComponentLink1Description="Manufacturer URL", ComponentLink1URL=http://www.microchip.com/, ComponentLink2Description=Datasheet, ComponentLink2URL=http://ww1.microchip.com/downloads/en/DeviceDoc/21117a.pdf, ComponentLink3Description="Package Specification", ComponentLink3URL=http://www.microchip.com/stellent/groups/techpub_sg/documents/packagingspec/en012702.pdf, DatasheetVersion="revA, Mar-2003", PackageDescription="8-Lead Plastic Micro Small Outline Package (MS) [MSOP]", PackageReference=MSOP-MS8, PackageVersion="revBB, Aug-2009", RevisionNote="URLs added."
U7: Supplier Part Number 1=505-ADUM6028-3WBRIZ-RLTR-ND, Supplier 1=DigiKey
U8_U_Small_DDS1 U8_U_Small_DDS2 U8_U_Small_DDS3 U8_U_Small_DDS4: library part CMP-0293-00077-1, "Low Power, 12.65 mW, 2.3 V to 5.5 V, Programmable Waveform Generator, 10-Bit, Serial, RM-10, 50 Tube, Pb-Free", Code_JEDEC=MO-187-BA, Compliance Range (V)=650mV, ComponentLink1Description="Manufacturer URL", ComponentLink1URL=www.analog.com, ComponentLink2Description=Datasheet, ComponentLink2URL=http://www.analog.com/static/imported-files/data_sheets/AD9833.pdf, ComponentLink3Description="Package Specification", ComponentLink3URL=http://www.analog.com/static/imported-files/packages/PKG_PDF/MSOP%28RM%29/RM_10.pdf, DatasheetVersion="Rev. D", FS Iout (mA nom)=3mA, I Supply total (max)=5.5mA, I/O Interface=Serial, Master fclk=25MHz, PackageDescription="10-Lead Mini Small Outline Package [MSOP]", PackageReference=RM-10, PackageVersion=5/8/2005, REFCLK Multiplier=No, Resolution (Bits)=10bit, Tuning Word Width (bits)=28bit
U9: library part CMP-0492-02712-1, "Micropower No-Opto Isolated Flyback Converter, 2.8 to 42 V, -40 to 125 degC, 8-Pin SOIC (S8E), RoHS, Tape and Reel", Output Current="3.6 A", PartNumber=LT8302, Temperature Max="125 degC", Temperature Min="-40 degC", ComponentLink1Description="Manufacturer URL", ComponentLink1URL=http://www.linear.com/, ComponentLink2Description=Datasheet, ComponentLink2URL=http://cds.linear.com/docs/en/datasheet/8302fa.pdf, ComponentLink3Description="Package Specification", ComponentLink3URL=http://cds.linear.com/docs/en/packaging/05081857_A_S8E.pdf, DatasheetVersion="Rev. A", Mounting Technology="Surface Mount", Number Of Outputs=1, PackageDescription="8-Pin Plastic Small Outline Integrated Circuit Package, Body 4.90 x 3.90 mm, Pitch 1.27 mm", PackageVersion="Rev. A, 10/2013", Packing="Tape and Reel", RoHS=TRUE, VIN Max="42 V", VIN Min="2.8 V"
U10: library part CMP-0510-00012-1, "I2C-Programmable Any-Frequency CMOS Clock Generator + VCXO, 2.5 / 3.3 V, 0.008 to 160 MHz Output, -40 to 85 degC, 10-pin SOP", Manufacturer="Silicon Labs", Output Frequency (MHz)="0.008 to 160", Code_IPC=J-STD-020, Code_JEDEC=MO-187, ComponentLink1Description="Manufacturer URL", ComponentLink1URL=http://www.silabs.com/, ComponentLink2Description=Datasheet, ComponentLink2URL=http://www.silabs.com/Support%20Documents/TechnicalDocs/Si5351.pdf, ComponentLink3Description="Package Specification", ComponentLink3URL="http://www.silabs.com/Support Documents/TechnicalDocs/C8051T60x.pdf", DatasheetVersion="Rev. 0.95", Mounting Technology="Surface Mount", Output Format=LVCMOS, PackageDescription="10-Pin Mini Small Outline Package, Body 3 x 3 mm, Pitch 0.5 mm", PackageReference=MSOP-10, PartNumber=Si5351A-B-GT, Reference Inputs=1, Sub-Family="Clock Generators", VDD="2.5 V; 3.3 V"
U11_U_Current_Source1 U11_U_Current_Source2 U11_U_Current_Source3 U11_U_Current_Source4 U12_U_Current_Source1 U12_U_Current_Source2 U12_U_Current_Source3 U12_U_Current_Source4 U15_U_Current_Source1 U15_U_Current_Source2 U15_U_Current_Source3 U15_U_Current_Source4 U17: library part CMP-0017-00714-2, "High Voltage (100V), High-Current (50mA) Operational Amplifier, G=1 Stable, 10 to 100 V, -55 to 125 degC, 8-pin SOP (DDA8), Green (RoHS & no Sb/Br)", Manufacturer="Texas Instruments", Rating=Catalog, Total Supply Voltage(Max)(+5V is 5, +/-5V is 10)=100, Total Supply Voltage(Min)(+5V is 5, +/-5V is 10)=10, CMRR(Min)(dB)=100, Code_JEDEC=MS-012, ComponentLink1Description="Manufacturer URL", ComponentLink1URL=http://www.ti.com/, ComponentLink2Description=Datasheet, ComponentLink2URL=http://www.ti.com/lit/ds/symlink/opa454.pdf, ComponentLink3Description="Package Specification", ComponentLink3URL=http://www.ti.com/litv/pdf/mpds092e, DatasheetVersion=SBOS391A, Eco-Plan="Green (RoHS & no Sb/Br)", GBW(Typ)(MHz)=2.5, IIB(Max)(pA)=100, Iq per channel(Max)(mA)=4, Mounting Technology="Surface Mount", Number of Channels=1, Offset Drift(Typ)(uV/C)=1.6, PackageDescription="8-Pin PowerPAD(TM) Plastic Small Outline, Body 3.9 x 4.9 mm, Pitch 1.27 mm", PackageReference=DDA0008C, PackageVersion="4202561/F, 12/2011", PartNumber=OPA454AIDDA, Slew Rate(Typ)(V/us)=13, Sub Family="General Purpose Amplifier, High Output Current Amplifier (>=50mA), High Supply Voltage Amplifier (>=30V), Precision Amplifier", Vio (25C)(Max)(mV)=4, Vn at 1kHz(Typ)(nV/rtHz)=47
U13: library part CMP-0136-00767-1, "Low Quiescent Current LDO, 3-Pin SOT-23, Extended Temperature, Tape and Reel", Code_IPC=SOT23-3, DatasheetVersion="revB, Feb-2007", PackageDescription="3-Lead Plastic Small Outline Transistor (TT) [SOT-23]", PackageReference=SOT-23-TT3, PackageVersion="revBB, Aug-2009"
U14: library part 12V_Supply
U16_U_Current_Source1 U16_U_Current_Source2 U16_U_Current_Source3 U16_U_Current_Source4 U18: library part CMP-0188-00744-2, "Low-Cost 64-Step Volatile Digital POT, 6-Pin SOT-23, Extended Temperature, Tape and Reel", Code_IPC=SOT26A-6, ComponentLink1Description="Manufacturer URL", ComponentLink1URL=http://www.microchip.com/, ComponentLink2Description=Datasheet, ComponentLink2URL=http://ww1.microchip.com/downloads/en/DeviceDoc/21978c.pdf, ComponentLink3Description="Package Specification", ComponentLink3URL=http://www.microchip.com/stellent/groups/techpub_sg/documents/packagingspec/en012702.pdf, DatasheetVersion="revC, Dec-2006", PackageDescription="6-Lead Plastic Small Outline Transistor (CH) [SOT-23]", PackageReference=SOT-23-CH6, PackageVersion="revBB, Aug-2009", RevisionNote="URLs added."
X1: Supplier Part Number 1=SER3691CT-ND, ComponentLink1Description="New link", Supplier 1=DigiKey

## Via types
v1: diameter 25, hole 15, Top Layer to Bottom Layer, 234 vias
v2: diameter 19.68, hole 7.87, Top Layer to Bottom Layer, 58 vias
v3: diameter 19.68, hole 7.87, Top Layer to Bottom Layer, tented both sides, 52 vias
v4: diameter 19.68, hole 11.81, Top Layer to Bottom Layer, 27 vias
v5: diameter 50, hole 30, Top Layer to Bottom Layer, 5 vias
v6: diameter 75, hole 45, Top Layer to Bottom Layer, 2 vias

## Nets (pads, with @x,y where several pads share a name; then routed paths per layer and width w, separated by ;. In a path a pad name is that pad's centre, name@x,y a point inside that pad or via, vN(x,y) a via of type N, cw(c..) or ccw(c..) an arc to the next point about the centre after c; other vN are vias at no path point)
1V8: 
2V5: C11.2 R16.1 U13.2 | length 533.8
  Top Layer w10: U13.2@703.74,4812.4 794.09,4812.4 C11.2@800,4806.5 1011.29,4806.5 1120,4915.2 R16.1@1120,4985.31
3V3: B?.1 C8.2 C9.2 C10.2 C12_U_Current_Source1.2 C12_U_Current_Source2.2 C12_U_Current_Source3.2 C12_U_Current_Source4.2 C13.2 C15_U_Current_Measure1.2 C15_U_Current_Measure2.2 C15_U_Current_Measure3.2 C15_U_Current_Measure4.2 C23.2 C24.2 C27_U_Small_DDS1.2 C27_U_Small_DDS2.2 C27_U_Small_DDS3.2 C27_U_Small_DDS4.2 C28_U_Small_DDS1.2 C28_U_Small_DDS2.2 C28_U_Small_DDS3.2 C28_U_Small_DDS4.2 C29_U_Small_DDS1.2 C29_U_Small_DDS2.2 C29_U_Small_DDS3.2 C29_U_Small_DDS4.2 R5.2 R6.2 U1.3V3 U2_U_Current_Measure1.8 U2_U_Current_Measure2.8 U2_U_Current_Measure3.8 U2_U_Current_Measure4.8 U7.3 U8_U_Small_DDS1.2 U8_U_Small_DDS2.2 U8_U_Small_DDS3.2 U8_U_Small_DDS4.2 U10.1 U10.7 U13.3 U16_U_Current_Source1.1 U16_U_Current_Source2.1 U16_U_Current_Source3.1 U16_U_Current_Source4.1 U18.1 | length 2970.6
  Top Layer w10: U8_U_Small_DDS2.2@379.69,3872.68 379.69,3952.4 390.31,3963.03 C29_U_Small_DDS2.2@390.31,3965 C28_U_Small_DDS2.2@390.31,4020 v1(390.31,4064.69) ; U8_U_Small_DDS3.2@385.31,3260 385.31,3339.72 395.94,3350.35 C29_U_Small_DDS3.2@395.94,3352.32 C28_U_Small_DDS3.2@395.94,3407.32 v1(395.94,3452.01) ; U8_U_Small_DDS4.2@394.37,2630 394.37,2709.72 405,2720.35 C29_U_Small_DDS4.2@405,2722.32 C28_U_Small_DDS4.2@405,2777.32 v1(405,2822.01) ; U8_U_Small_DDS1.2@409.69,4492.68 409.69,4572.4 420.31,4583.03 C29_U_Small_DDS1.2@420.31,4585 C28_U_Small_DDS1.2@420.31,4640 v1(420.31,4684.69) ; v1(475,3825) C27_U_Small_DDS2.2@475,3870.31 ; v1(480.63,3212.32) C27_U_Small_DDS3.2@480.63,3257.64 ; v1(489.69,2582.32) C27_U_Small_DDS4.2@489.69,2627.64 ; v1(505,4445) C27_U_Small_DDS1.2@505,4490.31 ; v1(605,4595) 616.5,4606.5 C10.2@616.5,4655 616.5,4768.19 623.31,4775 U13.3@625,4775 ; v1(695,4170) C12_U_Current_Source1.2@753.5,4170 827.32,4170 836.1,4178.78 U16_U_Current_Source1.1@836.1,4189.25 ; v1(721.5,2283.5) C12_U_Current_Source4.2@780,2283.5 853.82,2283.5 862.6,2292.28 U16_U_Current_Source4.1@862.6,2302.76 ; v1(729.09,3546.26) C12_U_Current_Source2.2@787.6,3546.26 861.42,3546.26 870.2,3555.04 U16_U_Current_Source2.1@870.2,3565.51 ; v1(731.18,2918.5) C12_U_Current_Source3.2@789.69,2918.5 863.5,2918.5 872.28,2927.28 U16_U_Current_Source3.1@872.28,2937.76 ; v1(925.31,2025.31) C9.2@970,2025.31 971.97,2025.31 992.6,2004.68 U10.7@1045.28,2004.68 ; U10.1@1204.72,1945.63 1204.72,1886.93 1209.69,1881.97 C8.2@1209.69,1880 v1(1255,1880) ; R6.2@1275,2079.69 v1(1275,2125) ; U18.1@1292.24,5022.6 1292.24,4970.24 1316.5,4945.98 C13.2@1316.5,4945 v1(1360,4945) ; R5.2@1345,2054.69 1345,2080 v1(1370,2105) ; v1(2605,1730) C23.2@2653.5,1730 C24.2@2653.5,1805 2655,1806.5 U7.3@2655,1891.02 ; U2_U_Current_Measure1.8@2608.39,4668.5 2608.39,4608.11 C15_U_Current_Measure1.2@2618.5,4597.99 v1(2618.5,4546.5) ; U2_U_Current_Measure2.8@2618.39,3985.51 2618.39,3925.12 C15_U_Current_Measure2.2@2628.5,3915 v1(2628.5,3863.5) ; U2_U_Current_Measure4.8@2623.39,2700.04 2623.39,2639.65 C15_U_Current_Measure4.2@2633.5,2629.53 v1(2633.5,2578.03) ; U2_U_Current_Measure3.8@2623.39,3348.5 2623.39,3288.11 C15_U_Current_Measure3.2@2633.5,3277.99 v1(2633.5,3226.5)
  other v4: 715,1835 665,1840 715,1950 665,1955 695,1995 655,2005 730,2040 685,2045
3V3_A: C14_U_Current_Measure1.2 C14_U_Current_Measure2.2 C14_U_Current_Measure3.2 C14_U_Current_Measure4.2 C25.2 C26.2 U2_U_Current_Measure1.1 U2_U_Current_Measure2.1 U2_U_Current_Measure3.1 U2_U_Current_Measure4.1 U7.6 | length 3068.9
  Top Layer w10: U2_U_Current_Measure1.1@2608.39,4798.43 2663.94,4798.43 C14_U_Current_Measure1.2@2670,4804.49 v1(2728.5,4804.49) ; U2_U_Current_Measure2.1@2618.39,4115.43 2673.94,4115.43 C14_U_Current_Measure2.2@2680,4121.5 v1(2738.5,4121.5) ; U2_U_Current_Measure4.1@2623.39,2829.96 2678.94,2829.96 C14_U_Current_Measure4.2@2685,2836.02 v1(2743.5,2836.02) ; U2_U_Current_Measure3.1@2623.39,3478.43 2678.94,3478.43 C14_U_Current_Measure3.2@2685,3484.49 v1(2743.5,3484.49) ; U7.6@2655,2268.98 2655,2356.5 C25.2@2658.5,2360 C26.2@2658.5,2435 v1(2658.5,2491.5)
  Layer 1 w20: v1(2658.5,2491.5) 2743.5,2576.5 v1(2743.5,2836.02) v1(2743.5,3484.49) 2743.5,4115.14 2738.5,4120.14 v1(2738.5,4121.5) 2738.5,4793.14 2728.5,4803.14 v1(2728.5,4804.49)
5V: C21.2 C22_U_PGA_Block1.2 C22_U_PGA_Block2.2 C22_U_PGA_Block3.2 C22_U_PGA_Block4.2 RUSB.1 U1.3V3_EN U1.VSYS U5.2 U5.4 U6_U_PGA_Block1.8 U6_U_PGA_Block2.8 U6_U_PGA_Block3.8 U6_U_PGA_Block4.8 U11_U_Current_Source1.8 U11_U_Current_Source2.8 U11_U_Current_Source3.8 U11_U_Current_Source4.8 U12_U_Current_Source1.8 U12_U_Current_Source2.8 U12_U_Current_Source3.8 U12_U_Current_Source4.8 U15_U_Current_Source1.8 U15_U_Current_Source2.8 U15_U_Current_Source3.8 U15_U_Current_Source4.8 U17.8 | length 2327
  Top Layer w10: U6_U_PGA_Block4.8@608.39,2202.32 610.39,2200.31 C22_U_PGA_Block4.2@675,2200.31 755.31,2200.31 v1(795,2240) ; U6_U_PGA_Block1.8@608.39,4042.32 610.39,4040.31 C22_U_PGA_Block1.2@675,4040.31 726.06,4040.31 755.75,4070 v1(795,4070) ; U6_U_PGA_Block2.8@623.39,3432.32 625.39,3430.31 C22_U_PGA_Block2.2@690,3430.31 760.31,3430.31 v1(780,3450) ; U6_U_PGA_Block3.8@628.39,2807.32 630.39,2805.31 C22_U_PGA_Block3.2@695,2805.31 v1(775.31,2805.31) ; v1(735,4925) U17.8@796.65,4925 ; U15_U_Current_Source1.8@738.5,4579.84 v1(738.5,4631.5) ; U15_U_Current_Source4.8@765,2693.35 v1(765,2745) ; U15_U_Current_Source2.8@772.6,3956.1 v1(772.6,4007.76) ; U15_U_Current_Source3.8@774.69,3328.35 v1(774.69,3380) ; v1(1020.16,4308.15) U12_U_Current_Source1.8@1020.16,4361.5 ; v1(1046.65,2421.65) U12_U_Current_Source4.8@1046.65,2475 ; v1(1054.25,3684.41) U12_U_Current_Source2.8@1054.25,3737.76 ; v1(1056.34,3056.65) U12_U_Current_Source3.8@1056.34,3110 ; U11_U_Current_Source1.8@1276.85,4731.5 v1(1276.85,4783.15) ; U11_U_Current_Source4.8@1303.35,2845 v1(1303.35,2896.65) ; U11_U_Current_Source2.8@1310.94,4107.76 v1(1310.94,4159.41) ; U11_U_Current_Source3.8@1313.03,3480 v1(1313.03,3531.65)
  Top Layer w15: U5.2@2949.02,635 U5.4@3200.98,635 3200.98,664.47 3223.01,686.5 C21.2@3290,686.5 ; U1.3V3_EN@3075,895 3116.19,936.19 3233.81,936.19 U1.VSYS@3275,895 3275,830.05 3290.32,814.73 RUSB.1@3290.32,770 3290.16,769.84 3290.16,686.65 C21.2@3290,686.5 ; v5(3370,655) 3338.5,686.5 C21.2@3290,686.5
  other v4: 1645.72,1970.65 1575.72,2000.65 1715.72,2010.65 1630.72,2025.65 1800.72,2030.65 1605.6,2078.42 1660.72,2085.65 1720.72,2085.65 1785.72,2105.65 1730.72,2135.65 1795.72,2150.65 1150,2175 1210.72,2190.65 1270.72,2200.65 1320.72,2220.65 1726.42,2226.54 1220.72,2245.65 1175,2260 1275.72,2260.65
12V: C1.2 C3.2 C20.2 D5.2 L1.3 U5.3 U9.1 U9.3 U14.3 | length 2491.2
  Top Layer w10: U9.1@2177.42,265 2350,265 2385,300 2385,335 2355,365 2282.52,365 2233.5,414.02 2184.49,365 U9.3@2177.42,365
  Top Layer w15: L1.3@1225,460 1228.5,456.5 C1.2@1370,456.5 1464.49,456.5 D5.2@1470.98,450 1486.73,450 1550.44,513.7 2171.65,513.7 2228.17,457.19 2228.17,419.35 C3.2@2233.5,414.02 ; C3.2@2233.5,415.98 2244.7,427.19 2245.69,427.19 2423.5,605 2600,605 U14.3@2660,665 2783.5,541.5 C20.2@2870,541.5 2946.06,541.5 U5.3@2949.02,544.45
30V: C2.1 D1.1 D2.1 U11_U_Current_Source1.7 U11_U_Current_Source2.7 U11_U_Current_Source3.7 U11_U_Current_Source4.7 U12_U_Current_Source1.7 U12_U_Current_Source2.7 U12_U_Current_Source3.7 U12_U_Current_Source4.7 U15_U_Current_Source1.7 U15_U_Current_Source2.7 U15_U_Current_Source3.7 U15_U_Current_Source4.7 U17.7 | length 9590.7
  Top Layer w10: v1(735,4975) U17.7@796.65,4975 ; U15_U_Current_Source1.7@788.5,4579.84 v1(788.5,4631.5) ; U15_U_Current_Source4.7@815,2693.35 v1(815,2745) ; U15_U_Current_Source2.7@822.6,3956.1 v1(822.6,4007.76) ; U15_U_Current_Source3.7@824.69,3328.35 v1(824.69,3380) ; v1(968.5,4411.5) U12_U_Current_Source1.7@1020.16,4411.5 ; v1(995,2525) U12_U_Current_Source4.7@1046.65,2525 ; v1(1002.6,3787.76) U12_U_Current_Source2.7@1054.25,3787.76 ; v1(1004.69,3160) U12_U_Current_Source3.7@1056.34,3160 ; U11_U_Current_Source1.7@1276.85,4681.5 v1(1328.5,4681.5) ; U11_U_Current_Source4.7@1303.35,2795 v1(1355,2795) ; U11_U_Current_Source2.7@1310.94,4057.76 v1(1362.6,4057.76) ; U11_U_Current_Source3.7@1313.03,3430 v1(1364.69,3430)
  Top Layer w15: D1.1@647.01,700 647.01,820.16 C2.1@806.85,980 806.85,1266.89 D2.1@819.96,1280 850,1310.04 v5(850,1465)
  Layer 1 w20: v1(735,4975) 735,4973.65 762.5,4946.15 762.5,4658.85 788.5,4632.85 v1(788.5,4631.5) 848.54,4571.46 856.04,4571.46 968.5,4458.99 v1(968.5,4411.5) 911.5,4411.5 822.6,4322.6 v1(822.6,4007.76) 867.24,4007.76 1002.6,3872.4 v1(1002.6,3787.76) 937.76,3787.76 824.69,3674.69 v1(824.69,3380) 894.69,3310 902.18,3310 1004.69,3207.49 v1(1004.69,3160) 1003.73,3159.04 971.53,3159.04 815,3002.51 v1(815,2745) 890,2670 897.49,2670 995,2572.49 v1(995,2525) 920,2525 850,2455 v5(850,1465) 910,1405 1090,1405 1220,1535 1220,1605 1510,1895 1510,2401.82 1355,2556.82 v1(1355,2795) ; v1(1328.5,4681.5) 1328.5,4386.67 1362.6,4352.58 v1(1362.6,4057.76) 1362.6,3745.4 1364.69,3743.31 v1(1364.69,3430) 1364.69,2806.04
-30V: C4.2 D3.2 D4.2 U11_U_Current_Source1.4 U11_U_Current_Source2.4 U11_U_Current_Source3.4 U11_U_Current_Source4.4 U12_U_Current_Source1.4 U12_U_Current_Source2.4 U12_U_Current_Source3.4 U12_U_Current_Source4.4 U15_U_Current_Source1.4 U15_U_Current_Source2.4 U15_U_Current_Source3.4 U15_U_Current_Source4.4 U17.4 | length 8934.5
  Top Layer w10: U15_U_Current_Source1.4@888.5,4373.15 v1(936.85,4373.15) ; U15_U_Current_Source4.4@915,2486.65 v1(963.35,2486.65) ; U15_U_Current_Source2.4@922.6,3749.41 v1(970.94,3749.41) ; U15_U_Current_Source3.4@924.69,3121.65 v1(973.03,3121.65) ; U17.4@1003.35,5075 v1(1003.35,5128.35) ; v1(1013.5,4566.5) 1015.55,4566.5 1030.55,4581.5 U11_U_Current_Source1.4@1070.16,4581.5 ; v1(1040,2680) 1042.05,2680 1057.05,2695 U11_U_Current_Source4.4@1096.65,2695 ; v1(1047.6,3942.76) 1049.65,3942.76 1064.65,3957.76 U11_U_Current_Source2.4@1104.25,3957.76 ; v1(1049.69,3315) 1051.73,3315 1066.73,3330 U11_U_Current_Source3.4@1106.34,3330 ; U12_U_Current_Source1.4@1226.85,4511.5 v1(1283.5,4511.5) ; U12_U_Current_Source4.4@1253.35,2625 v1(1310,2625) ; U12_U_Current_Source2.4@1260.94,3887.76 v1(1317.6,3887.76) ; U12_U_Current_Source3.4@1263.03,3260 v1(1319.69,3260)
  Top Layer w15: v5(1010.04,1465.04) D3.2@1010.04,1280 1030,1260.04 C4.2@1030,980 1137.99,872.01 D4.2@1137.99,705
  Layer 1 w20: v1(1003.35,5128.35) 1003.35,5126.99 1013.5,5116.84 v1(1013.5,4566.5) 1013.5,4393.5 993.15,4373.15 v1(936.85,4373.15) 936,4372.3 936,4054.35 v1(1047.6,3942.76) 1047.6,3772.6 1024.41,3749.41 v1(970.94,3749.41) 970.1,3748.56 970.1,3394.59 v1(1049.69,3315) 1049.69,3139.69 1031.65,3121.65 v1(973.03,3121.65) 972.19,3120.81 972.19,2907.81 1040,2840 v1(1040,2680) 1040,2498.37 1028.28,2486.65 v1(963.35,2486.65) 962.5,2485.81 962.5,2021.39 1010.04,1973.85 v5(1010.04,1465.04) 1435,1890 1435,2224.32 1310,2349.32 v1(1310,2625) 1310,2817.06 1330.85,2837.91 1330.85,3028.61 1319.69,3039.77 v1(1319.69,3260) 1319.69,3466.19 1340.53,3487.03 1340.53,3691.87 1317.6,3714.8 v1(1317.6,3887.76) 1317.6,4066.05 1338.44,4086.9 1338.44,4263.85 1283.5,4318.79 v1(1283.5,4511.5)
\P\G\A\_\C\S\1: U1.GP15 U6_U_PGA_Block1.5 | length 3473.7
  Top Layer w10: U6_U_PGA_Block1.5@531.61,4042.32 531.61,3933.39 v1(555,3910)
  Bottom Layer w10: v1(555,3910) 555,3701.82 582.5,3674.32 582.5,3329.32 522.5,3269.32 522.5,2417.5 540,2400 540,2240 456,2156 456,1732.64 568.96,1619.69 1450.31,1619.69 U1.GP15@1475,1595
\P\G\A\_\C\S\2: U1.GP14 U6_U_PGA_Block2.5 | length 2930.1
  Top Layer w10: U6_U_PGA_Block2.5@546.61,3432.32 546.61,3303.39 v1(570,3280)
  Bottom Layer w10: v1(570,3280) 570,3167.06 542.5,3139.56 542.5,3027.5 567.5,3002.5 567.5,2242.5 470,2145 470,1738.44 568.84,1639.6 1530.4,1639.6 U1.GP14@1575,1595
\P\G\A\_\C\S\3: U1.GP13 U6_U_PGA_Block3.5 | length 2470.7
  Top Layer w10: U6_U_PGA_Block3.5@551.61,2807.32 551.61,2683.39 v1(590,2645)
  Bottom Layer w10: v1(590,2645) 590,2240 490,2140 490,1738.24 574.64,1653.6 1716.4,1653.6 U1.GP13@1775,1595
\P\G\A\_\C\S\4: U1.GP12 U6_U_PGA_Block4.5 | length 1822.2
  Top Layer w10: v1(515,2130) 531.61,2146.61 U6_U_PGA_Block4.5@531.61,2202.32
  Bottom Layer w10: v1(515,2130) 515,2125.94 512,2122.94 512,1861.68 609.41,1764.28 617.48,1764.28 685.76,1696 1774,1696 U1.GP12@1875,1595